# EAGLE board Breadboard_PowerSupplyStick_1.8V (EAGLE 5.06)
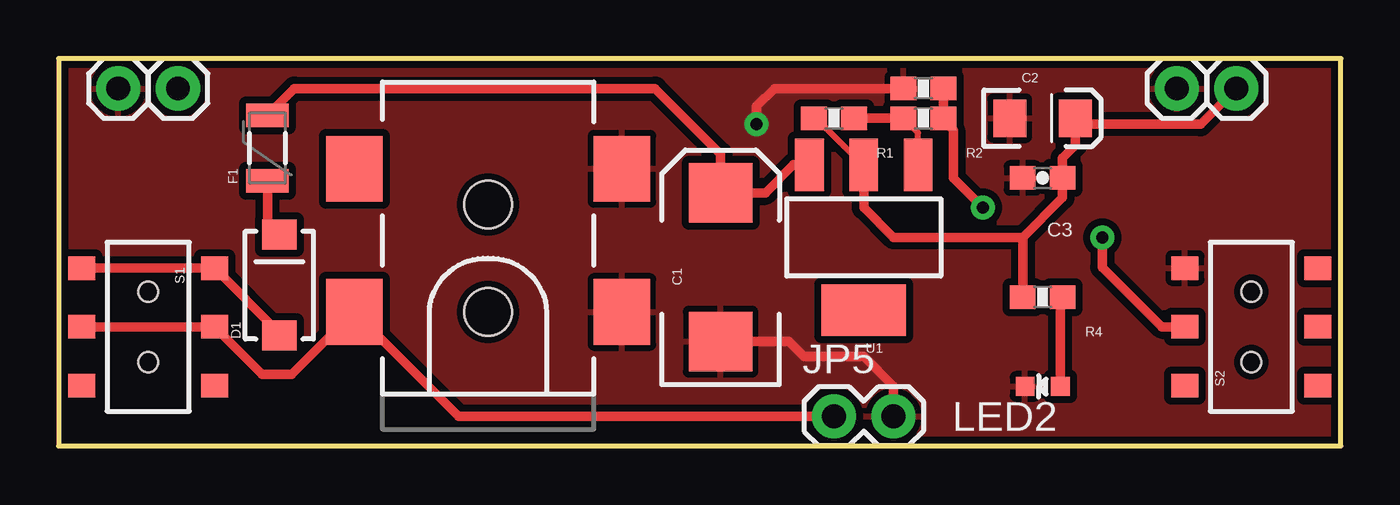
[diagram p0: board, top side]
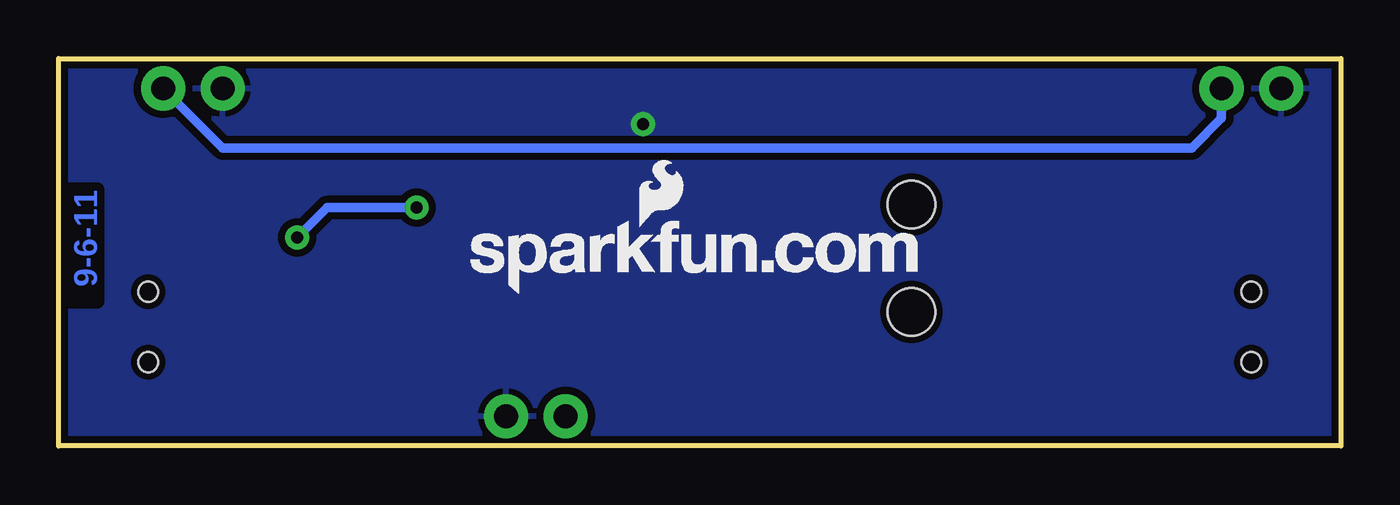
[diagram p1: board, bottom side, seen from below]

Size 54.61 x 16.51 mm. Coordinates in mm from the lower left corner, seen from the top.
Outline: 0,0 54.61,0 54.61,16.51 0,16.51 0,0
Copper layers (1*16): Top 0.035mm / dielectric 1.5mm / Bottom 0.035mm
Design rules "SparkFun": minimum track width 8mil, minimum drill 20mil, track to track 8mil, track to pad 8mil, pad to pad 8mil, via to via 8mil, smd to smd 8mil, copper to edge 10mil, drill to drill 8mil, minimum pad ring 12mil, minimum via ring 10mil, stop-mask expansion 4mil, vias tented up to drill 20mil, thermal gap 10mil
Net classes: 0 default: width 0.203 mm; 1 power: width 0.508 mm

## Footprints (pad centres in the part's own frame; a part is rotated, then mirrored left to right if it is on the bottom)
EIA7343 = smd 2.55 x 2.7: A 3.17,0; C -3.17,0
EIA3216 = smd 1.4 x 1.6: A 1.4,0; C -1.4,0
0603-CAP = smd 1.1 x 1: 1 -0.85,0; 2 0.85,0
SMA-DIODE = smd 1.27 x 1.47: A -2.15,0; C 2.15,0
PTC-1206 = smd 1 x 1.8: 1 -1.4,0; 2 1.4,0
POWER_JACK_SMD = smd 2.8 x 2.4: GND 0,-5.7; P$4 6.1,-5.7; VIN0 0,5.7; VIN1 6.1,5.7 | hole 2.032: 0,0; 4.572,0
1X01 = drill 1.016 pad 1.88 round: 1 0,0
1X02 = drill 1.016 pad 1.88 round: 1 0,0; 2 2.54,0
LED-0603 = smd 0.8 x 0.8: A 0,-0.75; C 0,0.75
0603-RES = smd 1.1 x 1: 1 -0.85,0; 2 0.85,0
AYZ0202 = smd 1 x 1.15: 1 -2.5,2.825; 2 0,2.825; 3 2.5,2.825; 4 -2.5,-2.825; 5 0,-2.825; 6 2.5,-2.825 | hole 0.85: 1.5,0; -1.5,0
SOT223 = smd 1.219 x 2.235: 1 -2.311,-3.099; 2 0,-3.099; 3 2.311,-3.099 | smd 3.6 x 2.2: 4 0,3.099

## Placement (x,y rotation side)
C1  100uF  [EIA7343]  28.19,7.62 90 top
C2  10uF  [EIA3216]  41.91,13.97 0 top
C3  0.1uF  [0603-CAP]  41.91,11.43 180 top
D1  MBRA  [SMA-DIODE]  9.4,6.86 90 top
F1  PTCSMD  [PTC-1206]  8.89,12.7 90 top
J1  Barrel Jack  [POWER_JACK_SMD]  18.29,5.71 90 top
JP1  M01PTH  [1X01]  2.54,15.24 0 top
JP2  M01PTH  [1X01]  5.08,15.24 0 top
JP3  M01PTH  [1X01]  50.16,15.24 0 top
JP4  M01PTH  [1X01]  47.62,15.24 0 top
JP5  [1X02]  33.02,1.27 0 top
LED2  Red  [LED-0603]  41.91,2.54 90 top
R1  240  [0603-RES]  33.02,13.97 180 top
R2  105  [0603-RES]  36.83,13.97 180 top
R3  287  [0603-RES]  36.83,15.24 0 top
R4  240  [0603-RES]  41.91,6.35 180 top
S1  AYZ  [AYZ0202]  3.81,5.08 270 top
S2  AYZ  [AYZ0202]  50.8,5.08 90 top
U1  LD1117  [SOT223]  34.29,8.89 180 top
U$2  LOGO-SFENEW  [SFE-NEW-WEBLOGO]  37.08,6.48 0 bottom

## Library data of the parts
C1-C3 D1 F1 J1 JP1-JP5 R1-R4 S1 S2 U1 U$2 = SparkFun
LED2 = SparkFun-Nate

## Nets
GND: C1.C C2.C C3.2 J1.GND J1.P$4 JP1.1 JP4.1 JP5.2 LED2.C R3.1 S2.3
N$1: D1.C F1.1
N$2: D1.A S1.1 S1.4
N$4: R2.1 R3.2 S2.2
N$5: R1.1 R2.2 U1.1
N$8: LED2.A R4.1
RAW: C1.A F1.2 U1.3
VCC: C2.A C3.1 JP2.1 JP3.1 R1.2 R4.2 U1.2
VIN: J1.VIN0 JP5.1 S1.2 S1.5

## Tracks (layer width: path | path; a pad name or v marks a point on that pad's centre or on a via)
GND  (via drill 0.51)
  Top 0.406: C1.C 31.11,4.45 31.75,3.81 34.29,3.81 35.56,2.54 JP5.2 | R3.1 30.48,15.24 29.72,14.48 v29.72,13.72
  pour Bottom (isolate 0.305): 0,16.51 54.61,16.51 54.61,0 0,0
  pour Top (isolate 0.305): 0,0 0,16.51 54.61,16.51 54.61,0
N$1
  Top 0.406: F1.1 8.89,9.01 D1.C
N$2
  Top 0.406: S1.4 S1.1 9.4,4.82 D1.A
N$4  (via drill 0.51)
  Top 0.406: R3.2 R2.1 37.59,13.97 38.1,13.46 38.1,11.43 v39.37,10.16 | S2.2 46.99,5.08 44.45,7.62 v44.45,8.89
  Bottom 0.406: v39.37,10.16 43.18,10.16 v44.45,8.89
N$5
  Top 0.203: U1.1 36.6,12.28
  Top 0.254: R2.2 36.6,13.35 U1.1
  Top 0.406: R2.2 R1.1
N$8
  Top 0.406: 43.05,6.35 R4.1 42.66,6.25 LED2.A
RAW
  Top 0.406: U1.3 31.29,11.99 30.09,10.79 C1.A 28.19,12.45 25.4,15.24 10.03,15.24 F1.2
VCC
  Top 0.203: U1.2 34.29,12.05
  Top 0.254: R1.2 32.26,13.97 34.24,11.99 U1.2
  Top 0.406: C2.A 43.18,13.97 | U1.2 34.29,10.16 35.56,8.89 41.06,8.89 | JP3.1 48.64,13.72 43.56,13.72 arc-90 C2.A | 41.06,8.89 R4.2 | 41.06,8.89 42.76,10.59 C3.1 42.76,12.28 43.31,12.83 C2.A
  Bottom 0.406: JP2.1 5.08,13.97 6.35,12.7 47.62,12.7 JP3.1
VIN
  Top 0.406: S1.5 S1.2 8.67,3.05 9.92,3.05 J1.VIN0 | J1.VIN0 11.95,5.08 | JP5.1 17.03,1.27 J1.VIN0

## Text on the board
Bottom: 9-6-11
tValues: 287 | 240 | 105 | 10uF | Barrel Jack | 100uF | 240 | Red